# Altium PCB revisi sistem.PcbDoc
Units mil, origin at the board's own origin, x right, y up, seen from the top; angles counter-clockwise.
Board outline 6000 x 4000 mil, 2 copper layers (Top Layer, Bottom Layer); 60 components, 60 nets, 246 pads, 49 vias.
Unrouted connection lines stored in the file: 3.
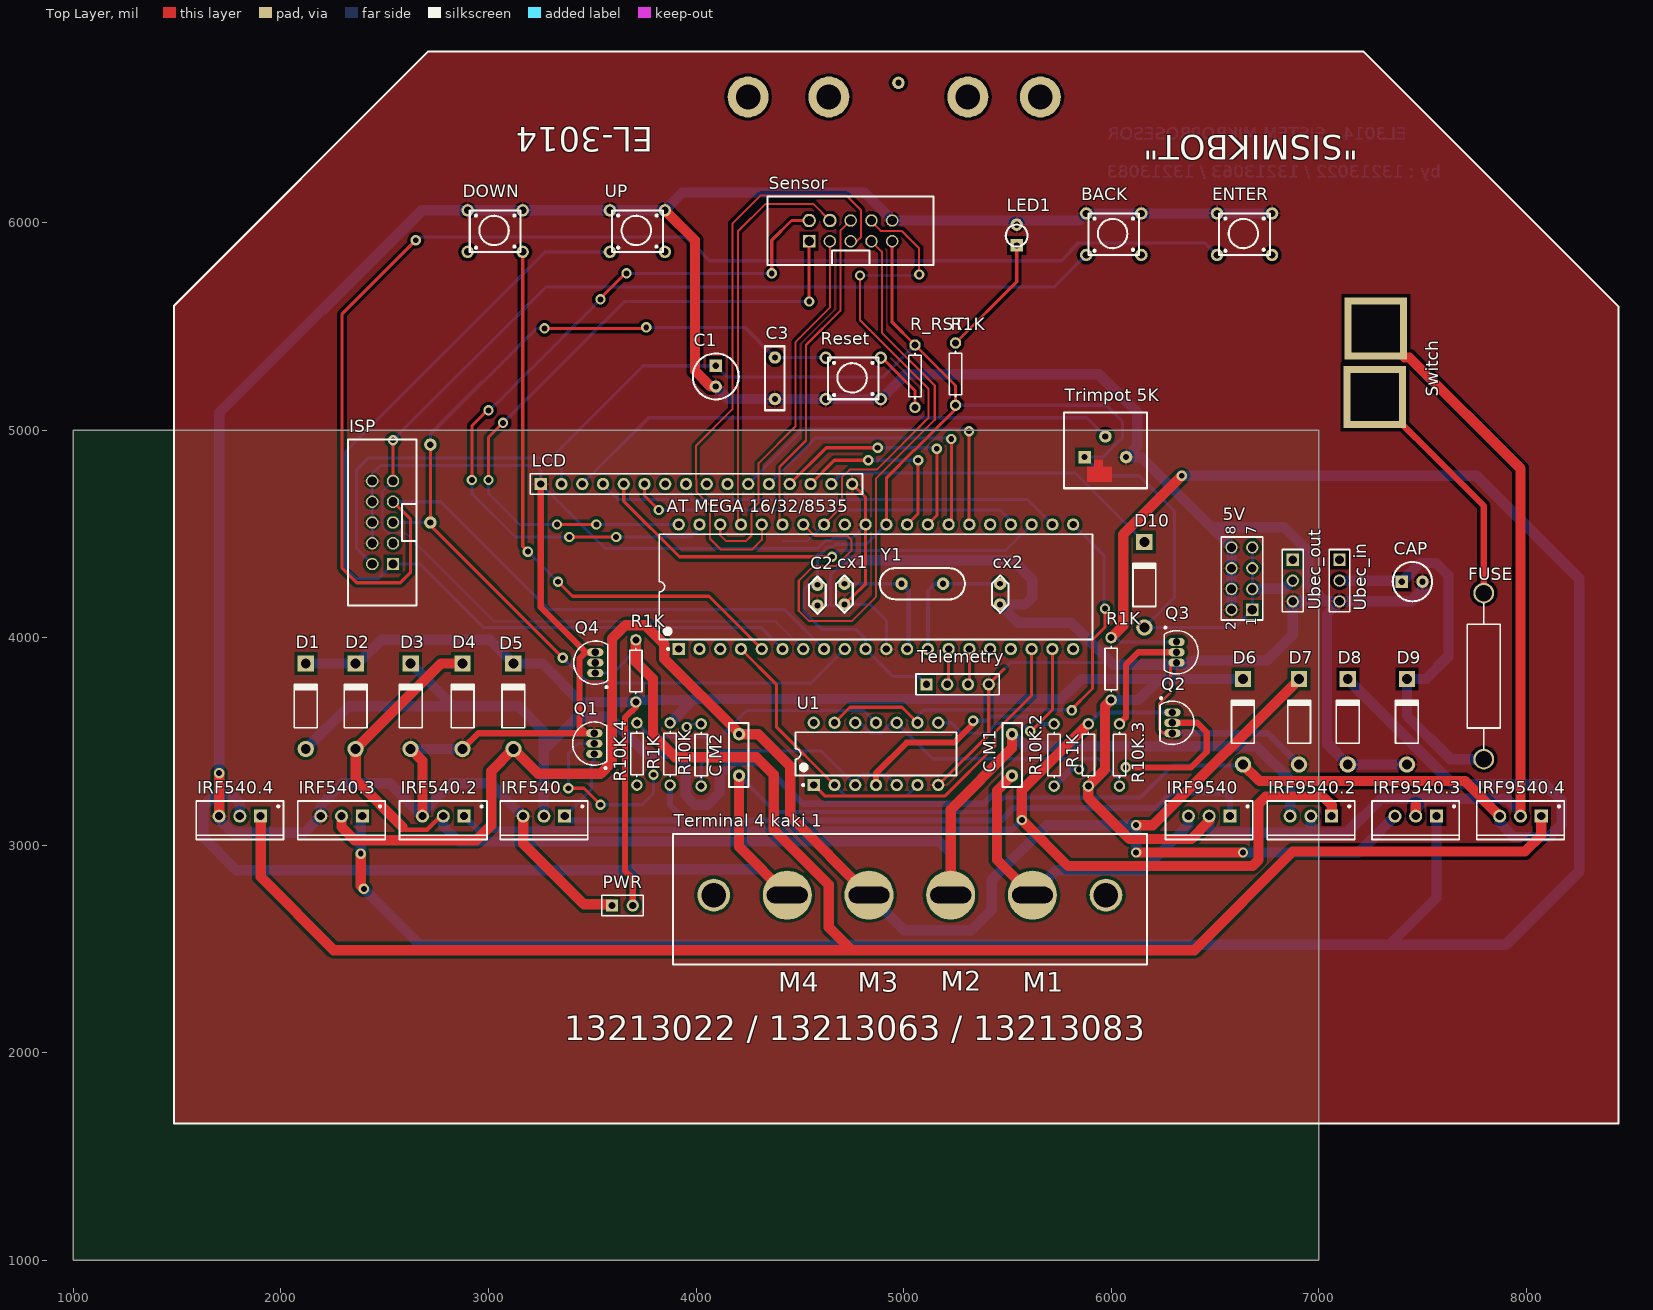
[diagram p0: Top Layer view]
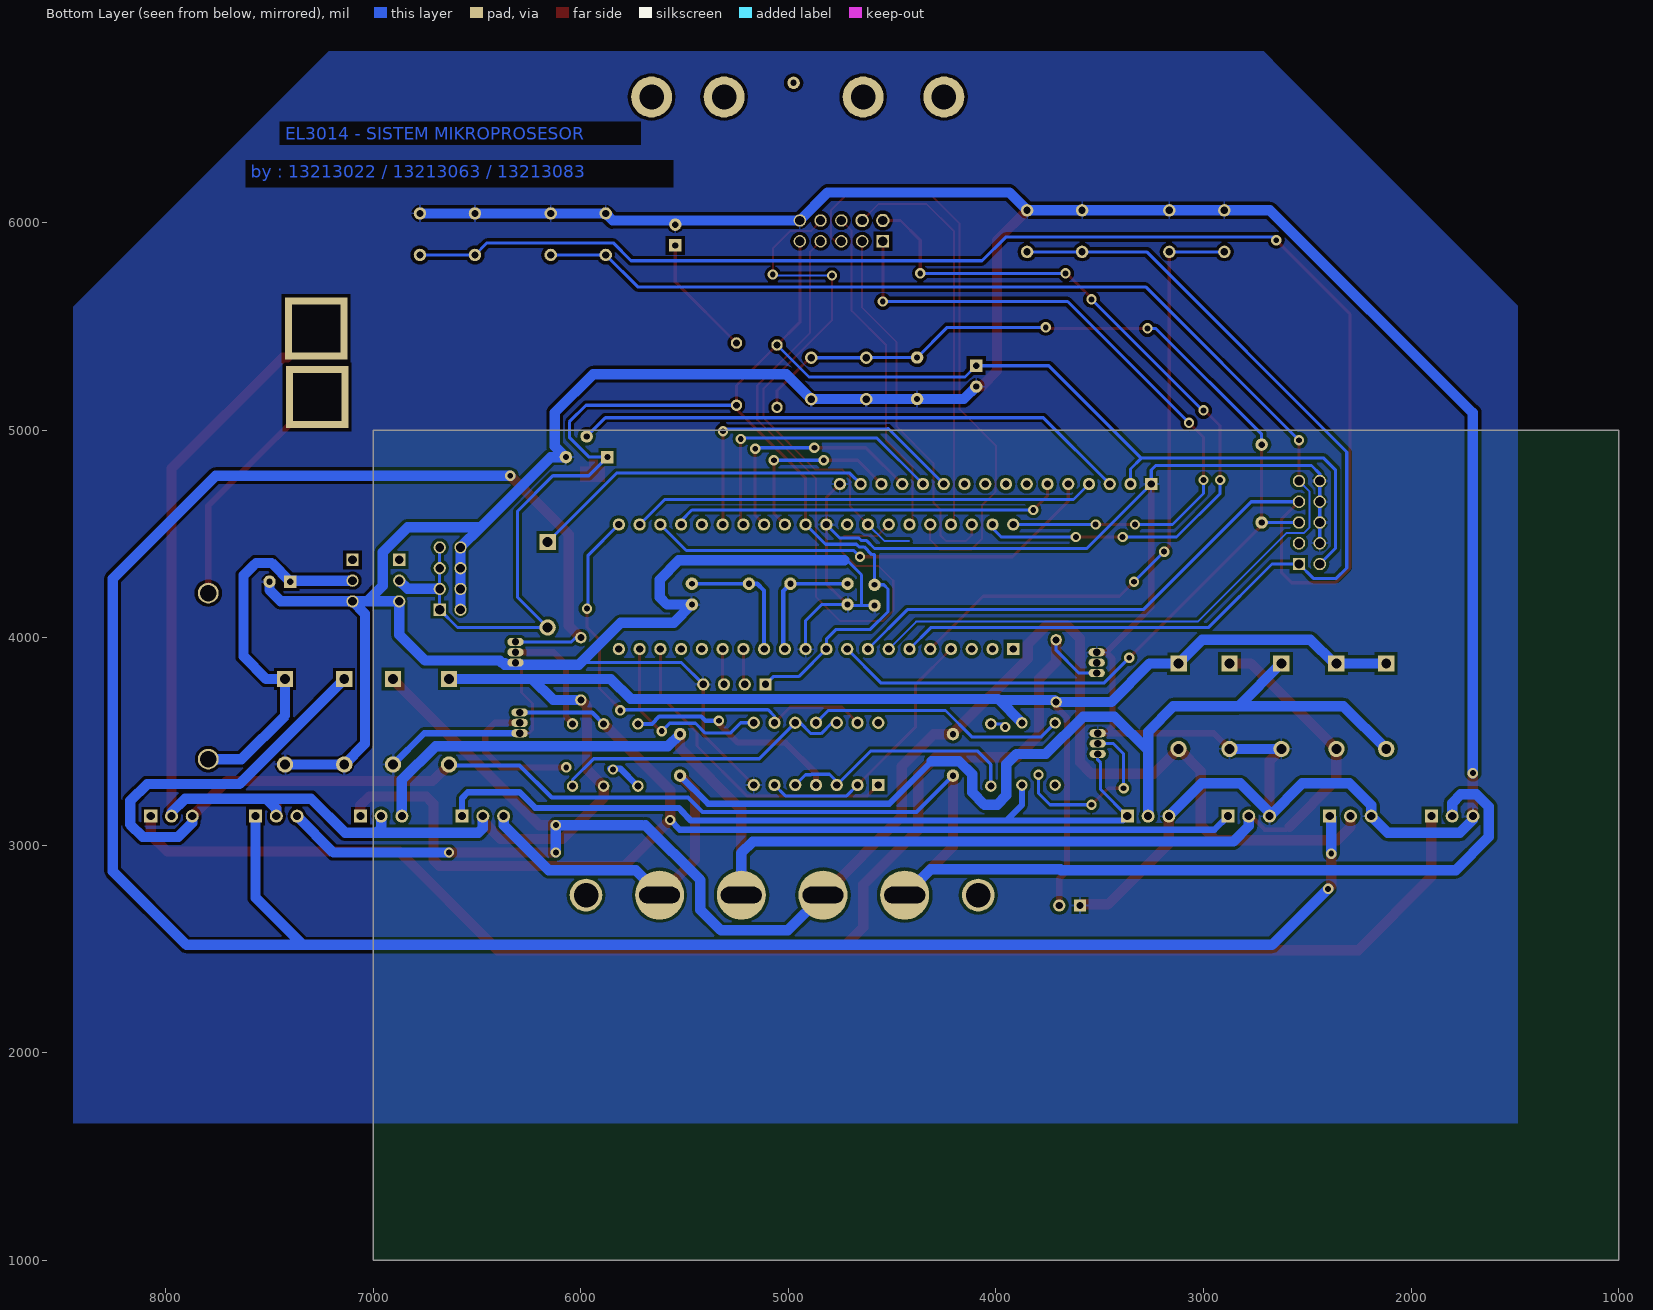
[diagram p1: Bottom Layer view, seen from below]

## Layer stack, top to bottom
Top Solder: solder mask 0.4, Solder Resist, Dk 3.5
Top Layer: signal copper 1.4
Dielectric 1: dielectric 12.6, FR-4, Dk 4.8
Bottom Layer: signal copper 1.4
Bottom Solder: solder mask 0.4, Solder Resist, Dk 3.5

## Board outline
1000,1000 7000,1000 7000,5000 1000,5000

## Design rules (kind name [scope] priority, off if disabled: settings)
Clearance [All] p1: gap=15
PolygonConnect [All] p1: connectstyle=Relief reliefconductorwidth=10 reliefentries=4 polygonreliefangle="90 Angle" airgapwidth=10
RoomDefinition "revisi sistem" [InComponentClass('revisi sistem')] p1: confinementstyle=ConfineIn formatcopy=TRUE lockcomponents=FALSE outline 1450,1570 8535,1570 8535,7260 1450,7260
RoutingVias [All] p1: holewidth=28 width=50 viastyle="Through Hole" minholewidth=28 minwidth=50 maxholewidth=28 maxwidth=50
SolderMaskExpansion [All] p1: expansion=4
Width [All] p1: maxlimit=70 minlimit=10 preferedwidth=15
30 further rules are at their usual default settings.

## Classes and differential pairs
component class "revisi sistem": 5V "AT MEGA 16/32/8535" BACK C1 C2 C3 C.M1 C.M2 CAP cx1 cx2 D1 D2 D3 D4 D5 D6 D7 D8 D9 D10 DOWN ENTER FUSE IRF540 IRF540.2 IRF540.3 IRF540.4 IRF9540 IRF9540.2 IRF9540.3 IRF9540.4 ISP LCD LED1 PWR Q1 Q2 Q3 Q4 R1K R10K R10K.2 R10K.3 R10K.4 R_RST Reset Sensor Telemetry "Terminal 4 kaki 1" "Trimpot 5K" U1 Ubec_in Ubec_out UP Y1

## Components (designator, comment, footprint, x,y, rotation, side; value= is the part's Value field where it differs from the comment)
5V "Header 4X2" HDR2X4 6680,4135 r90 top
"AT MEGA 16/32/8535" "ATmega32-16PI" 40P6 4866.85,4245.28 r90 top (schematic designator U?)
BACK "pushbutton" pushbutton 6445,5945 r0 top (schematic designator S3)
C1 "cap 220uF/16V" "cap 220uF/16V" 4095,5310 r270 top
C2 "cap 22/33uF" "cap 22/33uF" 4585,3855 r90 top
C3 "cap MKM 100nF" "cap MKM 100nF diri" 4380,5250 r90 top
C.M1 "cap MKM 100nF" "cap MKM 100nF diri" 5522.13,3435.28 r270 top
C.M2 "cap MKM 100nF" "cap MKM 100nF diri" 4207.13,3435.28 r90 top
CAP "cap 10uF/16V" "cap 10uF/16V" 7500,4270 r0 top
cx1 "cap 22/33uF" "cap 22/33uF" 4715,3860 r90 top
cx2 "cap 22/33uF" "cap 22/33uF" 5465,3860 r90 top
D1 "Diode 1N4001" DIO10.46-5.3x2.8 2120,3670 r90 top
D2 "Diode 1N4001" DIO10.46-5.3x2.8 2360,3670 r90 top
D3 "Diode 1N4001" DIO10.46-5.3x2.8 2625,3670 r90 top
D4 "Diode 1N4001" DIO10.46-5.3x2.8 2875,3670 r90 top
D5 "Diode 1N4001" DIO10.46-5.3x2.8 3120,3670 r90 top (schematic designator 5)
D6 "Diode 1N4001" DIO10.46-5.3x2.8 6635,3595 r90 top
D7 "Diode 1N4001" DIO10.46-5.3x2.8 6905,3595 r90 top
D8 "Diode 1N4001" DIO10.46-5.3x2.8 7140,3595 r90 top
D9 "Diode 1N4002" DIO10.46-5.3x2.8 7425,3595 r90 top
D10 "Diode 1N4002" DIO10.46-5.3x2.8 6160,4255 r90 top
DOWN "pushbutton" pushbutton 3465,5960 r0 top (schematic designator S1)
ENTER "pushbutton" pushbutton 7075,5945 r0 top (schematic designator S4)
FUSE "Inductor Adj" AXIAL-0.8 7795,3815 r270 top
IRF540 "NMOS-2" SFM-T3/A4.7V 3267.13,3140.28 r180 top
IRF540.2 "NMOS-2" SFM-T3/A4.7V 2782.13,3140.28 r180 top
IRF540.3 "NMOS-2" SFM-T3/A4.7V 2292.13,3140.28 r180 top
IRF540.4 "NMOS-2" SFM-T3/A4.7V 1802.13,3140.28 r180 top
IRF9540 "PMOS-2" SFM-T3/A4.7V 6472.13,3140.28 r180 top
IRF9540.2 "PMOS-2" SFM-T3/A4.7V 6962.13,3140.28 r180 top
IRF9540.3 "PMOS-2" SFM-T3/A4.7V 7467.13,3140.28 r180 top
IRF9540.4 "PMOS-2" SFM-T3/A4.7V 7972.13,3140.28 r180 top
ISP "Header Soket male 10 pin" "Header Soket male 10 pin"#1 2640,4455 r90 top
LCD "Header 16" HDR1X16 3251.85,4740.28 r0 top
LED1 "LED kecil" "LED kecil" 5445,5990 r90 top
PWR "Header 2" HDR1X2 3595,2710 r0 top
Q1 "NPN" BCY-W3 3510,3490 r0 top
Q2 "NPN" BCY-W3 6295,3590 r180 top
Q3 "NPN" BCY-W3 6315,3930 r180 top
Q4 "NPN" BCY-W3 3515,3880 r0 top
R1K "Res1" AXIAL-0.3 5250,5270 r270 top
R1K "Res1" AXIAL-0.3 3875,3440 r90 top
R1K "Res1" AXIAL-0.3 6000,3850 r270 top
R1K "Res1" AXIAL-0.3 5890,3435 r90 top
R1K "Res1" AXIAL-0.3 3710,3840 r90 top
R10K "Res1" AXIAL-0.3 4025,3435 r90 top
R10K.2 "Res1" AXIAL-0.3 5725,3435 r90 top
R10K.3 "Res1" AXIAL-0.3 6040,3435 r90 top
R10K.4 "Res1" AXIAL-0.3 3715,3440 r90 top
R_RST "Res1" AXIAL-0.3 5055,5260 r90 top
Reset "pushbutton" pushbutton 5190,5250 r0 top
Sensor "Header Soket male 10 pin" "Header Soket male 10 pin"#2 4645,5810 r0 top
Telemetry "Header 4" HDR1X4 5110,3775 r0 top
"Terminal 4 kaki 1" "Terminal Blok 4 kaki Besar" "TERMINAL 4 KAKI" 6171.85,3055.28 r180 top
"Trimpot 5K" "Trimpot" "Trimpot Duduk" 6065,4970 r90 top
U1 "CD4011BCN" N14A 4867.13,3440.28 r90 top
Ubec_in "Header 3" HDR1X3#1 7100,4375 r270 top
Ubec_out "Header 3" HDR1X3#2 6875,4375 r270 top
UP "pushbutton" pushbutton 4150,5960 r0 top (schematic designator S2)
Y1 "XTAL" XTAL 5090,4160 r0 top

## Footprints (in the part's own frame and the unit in brackets; to place one, negate y for a bottom-side part, rotate by r counter-clockwise, add the part's x,y. Pads: shape width x height; smd on the part's side, far side on the other; paste and mask are expansions set on the pad)
40P6 [mm] "DIP, 40-Leads, Row Spacing 15.24mm, Pitch 2.54mm, Body 52.2x13.95mm"
  rect 1.5x1.5 hole 0.9: 1(-7.62,24.13)
  round 1.5 hole 0.9: 2(-7.62,21.59) 3(-7.62,19.05) 4(-7.62,16.51) 5(-7.62,13.97) 6(-7.62,11.43) 7(-7.62,8.89) 8(-7.62,6.35) 9(-7.62,3.81) 10(-7.62,1.27) 11(-7.62,-1.27) 12(-7.62,-3.81) 13(-7.62,-6.35) 14(-7.62,-8.89) 15(-7.62,-11.43) 16(-7.62,-13.97) 17(-7.62,-16.51) 18(-7.62,-19.05) 19(-7.62,-21.59) 20(-7.62,-24.13) 21(7.62,-24.13) 22(7.62,-21.59) 23(7.62,-19.05) 24(7.62,-16.51) 25(7.62,-13.97) 26(7.62,-11.43) 27(7.62,-8.89) 28(7.62,-6.35) 29(7.62,-3.81) 30(7.62,-1.27) 31(7.62,1.27) 32(7.62,3.81) 33(7.62,6.35) 34(7.62,8.89) 35(7.62,11.43) 36(7.62,13.97) 37(7.62,16.51) 38(7.62,19.05) 39(7.62,21.59) 40(7.62,24.13)
  silkscreen extent -7.74,-26.5 6.45,26.5, body extent -7.05,-26.47 7.05,26.47, height 4.83
AXIAL-0.3 [mm] "Axial Device, Thru-Hole; 2 Leads; 0.3 in Pin Spacing"
  round 1.4 hole 0.85: 1(-3.81,0) 2(3.81,0)
  silkscreen extent -2.77,-0.76 2.77,0.76
AXIAL-0.8 [mil] "Axial Device, Thru-Hole; 2 Leads; 0.8 in Pin Spacing"
  round 100 hole 80: 1(-400,0) 2(400,0)
  silkscreen extent -350,-80 350,80
BCY-W3 [mm] "TO, Flat Index; 3 In-Line, Axial Leads; Body Dia. 4.8mm; Leads 0.55 x 0.51 mm (max)"
  oval 2x1 hole 0.9: 1(0,-1.27) 2(0,0) 3(0,1.27)
  silkscreen extent -2.65,-3.13 1.52,2.65, body extent -2.66,-2.66 1.52,2.66, height 5.33
"cap 10uF/16V" [mil]
  rect 60x60 hole 30: 1(-100,0)
  round 60 hole 30: 2(0,0)
  silkscreen extent -144,-95 46,95
"cap 22/33uF" [mil]
  round 60 hole 28: 1(300,0) 2(400,0)
  silkscreen extent 260,-40 440,40
"cap 220uF/16V" [mil]
  rect 60x60 hole 30: 1(0,0)
  round 60 hole 30: 2(100,0)
  silkscreen extent -59,-111 162,111
"cap MKM 100nF diri" [mil]
  round 60 hole 30: 1(-100,0) 2(100,0)
  silkscreen extent -154,-46 154,48
DIO10.46-5.3x2.8 [mm] "Diode, Axial; Body 5.2 x 2.7 mm (LxDia. max), Lead Dia. 0.86 mm (max)"
  round 2 hole 1.2: 1(-5.23,0)
  rect 2x2 hole 1.2: 2(5.23,0)
  silkscreen extent -2.65,-1.4 2.75,1.4
HDR1X2 [mm] "Connector; Header; 2 Position"
  rect 1.5x1.5 hole 0.9: 1(0,0)
  round 1.5 hole 0.9: 2(2.54,0)
  silkscreen extent -1.27,-1.27 3.81,1.27
HDR1X3#1 [mm] "Connector; Header; 3 Position"
  rect 1.5x1.5 hole 1.067: 1(0,0)
  round 1.5 hole 1.067: 2(2.54,0) 3(5.08,0)
  silkscreen extent -1.27,-1.27 6.35,1.27
HDR1X3#2 [mm] "Connector; Header; 3 Position"
  rect 1.524x1.524 hole 1.067: 1(0,0)
  round 1.5 hole 1.067: 2(2.54,0) 3(5.08,0)
  silkscreen extent -1.27,-1.27 6.35,1.27
HDR1X4 [mm] "Connector; Header; 4 Position"
  rect 1.5x1.5 hole 0.9: 1(0,0)
  round 1.5 hole 0.9: 2(2.54,0) 3(5.08,0) 4(7.62,0)
  silkscreen extent -1.27,-1.27 8.89,1.27
HDR1X16 [mm] "Connector; Header; 16 Position"
  rect 1.5x1.5 hole 0.9: 1(0,0)
  round 1.5 hole 0.9: 2(2.54,0) 3(5.08,0) 4(7.62,0) 5(10.16,0) 6(12.7,0) 7(15.24,0) 8(17.78,0) 9(20.32,0) 10(22.86,0) 11(25.4,0) 12(27.94,0) 13(30.48,0) 14(33.02,0) 15(35.56,0) 16(38.1,0)
  silkscreen extent -1.27,-1.27 39.37,1.27
HDR2X4 [mm] "Connector; Header; 4x2 Position"
  rect 1.5x1.5 hole 1.143: 1(0,0)
  round 1.5 hole 1.067: 2(0,2.54) 3(2.54,0) 4(2.54,2.54) 5(5.08,0) 6(5.08,2.54) 7(7.62,0) 8(7.62,2.54)
  silkscreen extent -1.27,-1.27 8.89,3.81
"Header Soket male 10 pin"#1 [mil]
  rect 60x60 hole 45: 1(-100,100)
  round 60 hole 45: 2(-100,200) 3(0,100) 4(0,200) 5(100,100) 6(100,200) 7(200,100) 8(200,200) 9(300,100) 10(300,200)
  silkscreen extent -300,-14 500,316
"Header Soket male 10 pin"#2 [mil]
  rect 60x60 hole 45: 1(-100,100)
  round 65 hole 45: 2(-100,200) 4(0,200)
  round 60 hole 45: 3(0,100) 5(100,100) 6(100,200) 7(200,100) 8(200,200) 9(300,100) 10(300,200)
  silkscreen extent -300,-14 500,316
"LED kecil" [mil]
  rect 60x60 hole 30: 1(-100,-100)
  round 60 hole 30: 2(0,-100)
  silkscreen extent -106,-153 0,-47
N14A [mm] "DIP, 14-Leads, Row Spacing 7.62mm, Pitch 2.54mm, Body 19.18x6.35mm"
  rect 1.5x1.5 hole 0.9: 1(-3.81,7.62)
  round 1.5 hole 0.9: 2(-3.81,5.08) 3(-3.81,2.54) 4(-3.81,0) 5(-3.81,-2.54) 6(-3.81,-5.08) 7(-3.81,-7.62) 8(3.81,-7.62) 9(3.81,-5.08) 10(3.81,-2.54) 11(3.81,0) 12(3.81,2.54) 13(3.81,5.08) 14(3.81,7.62)
  silkscreen extent -3.93,-9.85 2.65,9.85, body extent -3.55,-9.85 3.55,9.85, height 5.08
pushbutton [mil]
  round 60 hole 35: 1(-565,-101) 1(-300,-101) 2(-565,99) 2(-300,99)
  silkscreen extent -555,-101 -310,99
SFM-T3/A4.7V [mm] "TO, Thru-Hole, Vertical, Heatsink Mounted; 3 In-Line Leads; Pitch 2.54 mm"
  rect 1.6x1.6 hole 1: 1(-2.54,0)
  round 1.6 hole 1: 2(0,0) 3(2.54,0)
  silkscreen extent -5.35,-1.85 5.35,2.85, body extent -5.4,-1.9 5.4,2.9, height 19.3
"TERMINAL 4 KAKI" [mm] "TERMINAL HITAM 4 KAKI"
  round 6 hole 2 slot 5 at 0 deg: 1(14,7.5) 2(24,7.5) 3(34,7.5) 4(44,7.5)
  round 4 hole 3: " "(5,7.5) " "(53,7.5)
  silkscreen extent 0,0 58,16
"Trimpot Duduk" [mil]
  rect 60x60 hole 30: 1(-100,193)
  round 60 hole 30: 2(0,93) 3(-100,-7)
  silkscreen extent -250,-107 115,293
XTAL [mil]
  round 60 hole 30: 1(-100,100) 2(100,100)
  silkscreen extent -205,25 205,175

## Part data
5V: "Header, 4-Pin, Dual row"
"AT MEGA 16/32/8535": "8-Bit AVR Microcontroller with 32K Bytes of In-System Programmable Flash Memory"
D1 D2 D3 D4 D5 D6 D7 D8 D9 D10: "1 Amp General Purpose Rectifier"
FUSE: "Adjustable Inductor"
IRF540 IRF540.2 IRF540.3 IRF540.4: "N-Channel Power MOSFET"
IRF9540 IRF9540.2 IRF9540.3 IRF9540.4: "P-Channel Power MOSFET"
LCD: "Header, 16-Pin"
PWR: "Header, 2-Pin"
Q1 Q2 Q3 Q4: "NPN Bipolar Transistor"
R1K R1K R1K R1K R1K R10K R10K.2 R10K.3 R10K.4 R_RST: "Resistor"
Telemetry: "Header, 4-Pin"
"Terminal 4 kaki 1": library part "Terminal Blok 4 kaki"
"Trimpot 5K": library part "Trimpot Duduk"
U1: "Quad 2-Input NAND Buffered B series Gate, 14-Pin PDIP"
Ubec_in Ubec_out: "Header, 3-Pin"

## Free pads (board coordinates)
  round 196.85 hole 118.11: 0(4250.75,6605) 0(5659.25,6605) 2(5310,6605) 3(4640,6605)
  round 60 hole 30: 1(4975,6673.43) 2(2720,4555) 3(2720,4930)
  rect 300x300 hole 230 square: 4(7270,5160) 4(7275,5490)

## Via types
v1: diameter 50, hole 28, Top Layer to Bottom Layer, 49 vias

## Nets (pads, with @x,y where several pads share a name; then routed paths per layer and width w, separated by ;. In a path a pad name is that pad's centre, name@x,y a point inside that pad or via, vN(x,y) a via of type N, cw(c..) or ccw(c..) an arc to the next point about the centre after c; other vN are vias at no path point)
12-V: FUSE.1 pad.4@7270,5160 | length 1335.7
  Top Layer w30: pad.4@7147.5,5282.5 7795,4635 FUSE.1
12V: D1.2 D2.2 D5.2 D6.2 IRF9540.2 IRF9540.2.2 IRF9540.3.2 IRF9540.4.2 pad.4@7275,5490 PWR.2 R1K.1@3710,3690 R1K.1@5890,3285 R1K.2@3875,3590 R1K.2@6000,3700 | length 12167
  Top Layer w30: PWR.2 3695,2840 3657.44,2877.56 3657.44,3613.84 3691.16,3647.56 3692.56,3647.56 3710,3665 R1K.1@3710,3690
  Top Layer w50: R1K.2@6000,3700 5970,3670 5970,3365 5890,3285 5890,3230 6090,3030 6385,3030 6472.13,3117.13 IRF9540.2 ; pad.4@7157.5,5607.5 7415,5350 7436.57,5350 7972.13,4814.44 IRF9540.4.2 ; IRF9540.3.2 7467.13,3192.87
  Bottom Layer w15: D2.2 D2.2@2370.91,3875.91
  Bottom Layer w50: D1.2 D2.2 ; D2.2@2370.91,3875.91 2485,3990 3005.91,3990 D5.2 3259.09,3875.91 3445,3690 3710,3690 3720,3700 3985,3700 ; R1K.2@3875,3590 3990,3705 5760,3705 5855.91,3800.91 6234.41,3800.91 ; R1K.2@6000,3700 6133.5,3700 6234.41,3800.91 ; IRF9540.2 6472.13,3082.87 6495,3060 6985,3060 ; D6.2 6234.41,3800.91 ; IRF9540.2.2 6962.13,3082.87 6985,3060 ; IRF9540.3.2 7467.13,3177.13 7515,3225 ; IRF9540.4.2 7972.13,3157.87 7905,3225 7515,3225 ; 6985,3060 7135,3060 7300,3225 7515,3225
B1: "AT MEGA 16/32/8535.5" DOWN.1 | length 3069.1
  Top Layer w15: DOWN.1@3165,5859 3165,4440 v1(3190,4415) ; v1@3325,4280 v1(3335,4270) 3405,4200 4062.13,4200 4316.85,3945.28
  Bottom Layer w15: DOWN.1@2900,5859 DOWN.1@3165,5859 ; v1@3180,4425 v1(3190,4415) v1(3335,4270)
B2: "AT MEGA 16/32/8535.6" ISP.1 UP.1 | length 4824.2
  Bottom Layer w15: UP.1@3850,5859 3585,5859 3274,5859 2310,4895 2310,4336 2360,4286 2471,4286 ISP.1 2670,4355 2975,4050 4312.13,4050 4416.85,3945.28
B3: "AT MEGA 16/32/8535.7" BACK.1 ISP.9 | length 6685.7
  Top Layer w15: ISP.9 v1(2540,4951)
  Bottom Layer w10: ISP.9 2490,4705 2490,4530 2515,4505 2600,4505 3027.5,4077.5 4384.63,4077.5 4516.85,3945.28
  Bottom Layer w15: v1(2540,4951) 3279,5690 5726,5690 5880,5844 BACK.1@6145,5844
B4: "AT MEGA 16/32/8535.8" ENTER.1 ISP.7 | length 9090.9
  Top Layer w15: ISP.7 2625,4570 2625,4315 2575,4265 2365,4265 2295,4335 2295,5560 v1(2650,5915)
  Bottom Layer w15: ISP.7 2770,4655 3290,4135 4427.13,4135 4616.85,3945.28 ; v1(2650,5915) 2665,5930 3953,5930 4067,5816 5758,5816 5844,5902 6452,5902 6510,5844 ENTER.1@6775,5844
DIR1: "AT MEGA 16/32/8535.18" U1.1 | length 1534.5
  Top Layer w15: U1.1 4619.4,3238 5200,3238 5440,3478 5440,3545 5616.85,3721.85 5616.85,3945.28
DIR2: "AT MEGA 16/32/8535.19" U1.8 | length 951.1
  Top Layer w15: v1@5605,3540 5716.85,3651.85 5716.85,3945.28
  Bottom Layer w15: U1.8@5167.4,3590 U1.8 5229.72,3590.28 5280,3540 5400,3540 5447.78,3587.78 5572.22,3587.78 v1(5610,3550)
EN1: "AT MEGA 16/32/8535.1"
EN2: "AT MEGA 16/32/8535.2"
GND: 5V.2 5V.4 5V.6 5V.8 "AT MEGA 16/32/8535.11" "AT MEGA 16/32/8535.31" "Trimpot 5K.3" BACK.2 C1.2 C2.1 C3.1 CAP.2 cx1.1 cx2.1 D3.1 D4.1 D7.1 D8.1 D9.1 DOWN.2 ENTER.2 IRF540.2.3 IRF540.3 IRF540.3.3 IRF540.4.3 ISP.4 ISP.6 ISP.8 ISP.10 LCD.1 LCD.16 LED1.2 PWR.1 Q1.3 Q2.3 Q3.3 Q4.3 Reset.1 Sensor.10 Telemetry.4 U1.7 Ubec_in.3 Ubec_out.3 UP.2 | length 29396
  Top Layer w15: 3461.5,3540 3470,3540 ; C1.2@4070,5210 C1.2 ; cx1.1 4746,4191 4747.85,4191 4816.85,4260 4816.85,4545.28 4816.85,4675.28 LCD.16 ; U1.7 5410,3533.15 Telemetry.4 5483,3848 ; Q2.3 6250,3540 6233,3557 6233,3683 6286,3736 6286,3880 Q3.3
  Top Layer w30: D4.1 2950.91,3540 3461.5,3540 ; LCD.1 3251.85,4147.15 3469,3930 ; 3470,3540 3439,3571 3439,3900 3469,3930 ; Q4.3 3469,3930
  Top Layer w50: IRF540.4.3 v1(1702.13,3347.87) ; D3.1 2682.13,3406.97 IRF540.2.3 ; IRF540.3 3167.13,3007.87 3460,2715 3590,2715 PWR.1 ; UP.2@3850,6059 3995,5914 3995,5285 C1.2@4070,5210
  Bottom Layer w15: 1702.13,5085 1706,5085 ; ISP.4 ISP.6 ISP.8 ISP.10 2440,4790 2480,4830 3230,4830 3251.85,4808.15 LCD.1 3562.13,4430 4585.4,4430 4622.9,4467.5 4647.65,4467.5 4660.15,4480 4751.57,4480 4816.85,4545.28 ; C2.1 4647.5,4155 ; 4730,4375 4720,4375 4647.5,4302.5 4647.5,4155 ; 4916.85,3945.28 4916.85,4083.15 4840,4160 cx1.1 4710,4155 4647.5,4155 ; Telemetry.4 5515,3880 6000,3880
  Bottom Layer w30: Q2.3 6754.09,3540 D7.1
  Bottom Layer w50: IRF540.4.3 1702.13,3122.87 1764.85,3060.15 2112,3060.15 IRF540.3.3 2192.13,3192.13 2298,3298 2524.4,3298 IRF540.2.3 2682.13,3157.13 2823,3298 3009.4,3298 IRF540.3 ; v1(1702.13,3347.87) 1702.13,5085 ; 1706,5085 2680,6059 2900,6059 3165,6059 3585,6059 3850,6059 3936,6145 4810,6145 Sensor.10 5846,6010 5880,6044 6145,6044 6510,6044 ENTER.2@6775,6044 ; D3.1 D4.1 ; C1.2 4155,5150 C3.1 4889,5150 4890,5149 5010,5269 5941,5269 6125,5085 6125,4923 6072,4870 6145,4870 6482.5,4532.5 ; 4730,4372.5 5527.5,4372.5 5620,4280 5620,4195 5585,4160 cx2.1 5553,4072 5808,4072 6000,3880 6009.69,3870.32 6367.05,3870.32 6367.05,3877.95 6377.95,3877.95 6390,3890 6750,3890 6875,4015 Ubec_out.3 7030,4175 ; 5V.2 5V.4 5V.6 5V.8 6482.5,4532.5 ; D9.1 D8.1 7040,3489.09 7040,4115 Ubec_in.3 ; CAP.2 7500,4230 7445,4175 Ubec_in.3 ; 6482.5,4532.5 6834.07,4532.5 6955,4411.57 6955,4250 7030,4175 ; 7030,4175 Ubec_in.3
M1: "Terminal 4 kaki 1.1" C.M1.2 D1.1 D3.2 IRF540.2 IRF9540.3 | length 6460.4
  Top Layer w50: C.M1.2 5450,3263.15 5450,2930.67 5620.67,2760
  Bottom Layer w30: 4308.72,3405.28 4514,3200 5386.85,3200 C.M1.2
  Bottom Layer w50: D1.1 2325.91,3670 2830.91,3670 ; D3.2 2830.91,3670 ; IRF540.2 3267.13,3457.13 ; 4308.72,3405.28 4178.13,3405.28 4115,3342.14 4115,3255 4055.5,3195.5 3994.5,3195.5 3950,3240 3950,3390 3900,3440 3760,3440 3580,3620 3430,3620 3267.13,3457.13 ; 5620.67,2760 5620.67,2765.67 5735,2880 6155,2880 6372.13,3097.13 IRF9540.3 ; 2830.91,3670 3145,3670 3267.13,3547.87 3267.13,3457.13
M2: "Terminal 4 kaki 1.2" C.M1.1 D2.1 D4.2 IRF540.2.2 IRF9540.2.3 | length 6635.7
  Top Layer w20: 2585,3090 2600,3075 2705,3075 2770.28,3140.28 IRF540.2.2
  Top Layer w50: 2585,3090 2360,3315 D2.1 2771.81,3875.91 D4.2 ; 5226.97,2760 5226.97,3171.97 5522.13,3467.13 C.M1.1
  Bottom Layer w50: IRF540.2.2 2782.13,3092.87 2857,3018 5172,3018 5226.97,2963.03 5226.97,2760 ; C.M1.1 5580.4,3477 6700,3477 6862.13,3314.87 IRF9540.2.3
M3: "Terminal 4 kaki 1.3" C.M2.2 D5.1 D7.2 IRF540.3.2 IRF9540.3.3 | length 8602.7
  Top Layer w15: v1(6635,2965) v1@6645,2965
  Top Layer w50: IRF540.3.2 2292.13,3087.87 2355,3025 2942,3025 3013,3096 3013,3357.09 D5.1 3239.09,3345 3540,3345 3595,3400 3595,3995 3660,4060 3755,4060 3847.32,3967.68 3847.32,3899.18 4207.13,3539.38 C.M2.2 4299.72,3535.28 4454.13,3380.87 4454.13,3139.13 4833.27,2760 ; v1(6120,2965) v1(6635,2965) ; v1(6120,3097) 6201.09,3097 D7.2
  Bottom Layer w15: 5689,3097 5699,3107 5709,3097 ; v1(6120,2965) 6120,2985 6130,2995
  Bottom Layer w50: 4833.27,2760 5003.27,2590 5325,2590 5425,2690 5425,2833 5689,3097 ; 5709,3097 v1(6120,3097) v1(6120,2965) ; v1(6635,2965) 7191.85,2965 IRF9540.3.3
M4: "Terminal 4 kaki 1.4" C.M2.1 D6.1 D8.2 IRF540.4.2 IRF9540.4.3 | length 9739.5
  Top Layer w15: IRF9540.4.3@7872,3140.28 IRF9540.4.3
  Top Layer w50: C.M2.1 4207.13,2992.44 4439.57,2760 ; D6.1 6714.37,3309.72 7702.68,3309.72 IRF9540.4.3
  Bottom Layer w15: D6.1@6630.91,3385 D6.1
  Bottom Layer w20: C.M2.1 4382.4,3160 5414.13,3160 5484.13,3230 6140,3230 6295,3385 D6.1@6630.91,3385
  Bottom Layer w50: IRF540.4.2 1802.13,3202.87 1760,3245 1685,3245 1625,3185 1625,3040 1785,2880 3686.67,2880 3691.2,2884.53 4315.04,2884.53 4439.57,2760 ; D8.2 7645.91,3295 8090,3295 8170,3215 8170,3100 8110,3040 7940,3040 7872.13,3107.87 IRF9540.4.3
Netcx1_2: "AT MEGA 16/32/8535.12" cx1.2 Y1.1 | length 607.6
  Bottom Layer w15: cx1.2 Y1.1 ; 5016.85,3945.28 5025,3953.43
  Bottom Layer w20: Y1.1 5025,4225 5025,3953.43
Netcx2_2: "AT MEGA 16/32/8535.13" cx2.2 Y1.2 | length 643.5
  Bottom Layer w15: Y1.2 cx2.2
  Bottom Layer w20: 5116.85,3945.28 5116.85,4226.85 5150,4260 Y1.2
NetD10_2: D10.2 LCD.15 | length 1667.5
  Bottom Layer w15: LCD.15 4704.57,4793 5827.91,4793 D10.2
NetIRF540.2_1: IRF540.2.1 IRF9540.2.1 Q2.1 R1K.2@5890,3585 | length 5709.6
  Top Layer w15: IRF9540.2.1 IRF9540.2.1@7063,3140.28
  Top Layer w50: R1K.2@5890,3585 5570,3265 v1(5570,3122) 5792,2900 6680,2900 6710,2930 6710,3200 6745,3235 7020,3235 7062.13,3192.87 IRF9540.2.1
  Bottom Layer w20: R1K.2@5890,3585 5945,3640 Q2.1
  Bottom Layer w30: IRF540.2.1 2947.4,3075 5523,3075 v1(5570,3122)
NetIRF540.3_1: IRF540.3.1 IRF9540.3.1 Q3.1 R1K.1@6000,4000 | length 11995.4
  Top Layer w15: v1@2392.13,2797.87 v1(2400,2790) ; v1(6340,4780) v1@6350,4790
  Top Layer w50: v1(2385,2960) 2385,2805 v1@2392.13,2797.87 ; R1K.1@6000,4000 6057.5,4057.5 6057.5,4497.5 v1(6340,4780)
  Bottom Layer w15: v1(2385,2960) 2389.25,2960 2392.13,2962.87 v1@2395,2960 ; v1@2395,2795 v1(2400,2790) ; R1K.1@6000,4000 6025,4000 6045,3980 Q3.1
  Bottom Layer w50: v1(2385,2960) 2385,3133.15 2390,3138.15 IRF540.3.1 ; v1(2400,2790) 2670,2520 7340,2520 ; v1(6340,4780) 7760,4780 8255,4285 8255,2875 7900,2520 7340,2520 ; IRF9540.3.1 7567.13,2747.13 7340,2520
NetIRF540.4_1: IRF540.4.1 IRF9540.4.1 Q4.1 R1K.2@3710,3990 | length 9375.2
  Top Layer w50: IRF540.4.1 1902.13,2847.87 2255,2495 4750,2495 ; R1K.2@3710,3990 3710,3885 3792.5,3802.5 3792.5,3531.5 3900,3424 4291,3424 4375,3340 4375,3075 4640,2810 4640,2605 4750,2495 ; IRF9540.4.1 8072.13,3049.13 7993,2970 6875,2970 6400,2495 4750,2495
  Bottom Layer w15: Q4.1 3601,3830 3710,3939 R1K.2@3710,3990
NetIRF540_1: IRF540.1 IRF9540.1 Q1.1 R1K.1@3875,3290 | length 3928.6
  Bottom Layer w15: IRF540.1 3495.64,3268.79 3495.64,3396.91 3510,3411.27 Q1.1
  Bottom Layer w30: IRF540.1 3387.4,3120 3948.5,3120 ; R1K.1@3875,3290 3875,3193.5 3948.5,3120 ; IRF9540.1 6572.13,3227.87 6545,3255 6295,3255 6220,3180 5528.11,3180 5476.57,3125 5471.57,3120 3948.5,3120
NetLCD_3: "Trimpot 5K.2" LCD.3 | length 2689.8
  Bottom Layer w15: LCD.3 3771.51,5059.94 5882.06,5059.94 5972,4970
NetLED1_1: LED1.1 R1K.1@5250,5420 | length 592.2
  Top Layer w15: R1K.1@5250,5420 5545,5715 LED1.1
NetQ1_2: Q1.2 R10K.2 | length 981.1
  Top Layer w15: v1(3385,3275) 3460,3275 v1(3540,3195) v1@3550,3185
  Bottom Layer w15: v1@3385,3265 v1(3385,3275) 3385,3440 3435,3490 Q1.2 ; v1(3540,3195) 3740,3195 3795,3250 v1(3795,3340) ; v1@3945,3560 3970,3585 R10K.2
  other v1: 3955,3570 3955,3570
NetQ2_2: Q2.2 R10K.2.1 | length 902.4
  Top Layer w30: v1@6060,3375 6385,3375 6460,3450 6460,3545 6415,3590 Q2.2 Q2.2@6272.5,3590
  Bottom Layer w30: R10K.2.1 5810,3370 v1@5860,3370
  other v1: 5845,3365 5845,3365 6070,3375
NetQ3_2: Q3.2 R10K.3.2 | length 566.7
  Top Layer w30: R10K.3.2 6071,3616 6071,3870 6131,3930 Q3.2
NetQ4_2: Q4.2 R10K.4.1
NetR10K.2_2: R10K.2.2 U1.4 | length 1051.3
  Top Layer w30: U1.4 4867.13,3347.13 5015,3495 5245,3495 5335,3585 v1(5335,3600)
  Bottom Layer w20: v1(5335,3600) 5400,3600 5420,3620 5420.28,3620.28 5622.22,3620.28 5622.5,3620 5657.5,3585 R10K.2.2
NetR10K.3_1: R10K.3.1 U1.10 U1.12 | length 1460.2
  Bottom Layer w15: U1.12 4790,3590.28 4842.28,3538 4891,3538 4943.28,3590.28 U1.10 5140.4,3417 5938,3417 6040,3315 R10K.3.1
NetR10K.4_2: R10K.4.2 U1.11 | length 1258.1
  Bottom Layer w15: R10K.4.2 3784,3521 4115,3521 4243,3649 4808.4,3649 U1.11
NetR10K_1: R10K.1 U1.3 U1.5 | length 1195.3
  Bottom Layer w15: R10K.1 4025,3390 4090,3455 4602.4,3455 U1.3 4767.13,3307.13 4802.3,3342.3 4888.68,3342.3 4890.98,3340 4917.4,3340 U1.5
P1: "AT MEGA 16/32/8535.3"
P2: "AT MEGA 16/32/8535.20"
P3: "AT MEGA 16/32/8535.17"
P4: "AT MEGA 16/32/8535.16"
PA0: "AT MEGA 16/32/8535.40" Sensor.1 | length 3411.5
  Top Layer w15: v1(3000,4760) 3000,4965 v1(3070,5035) v1@3075,5040 ; v1@3320,4535 v1(3330.28,4545.28) v1(3520,4545.28) ; v1(4545,5620) Sensor.1
  Bottom Layer w15: v1@3000,4775 v1(3000,4760) 3000,4695 3149.72,4545.28 v1(3330.28,4545.28) ; v1(3070,5035) 3655,5620 v1(4545,5620) ; v1@3500.28,4545.28 v1(3520,4545.28) 3916.85,4545.28
PA1: "AT MEGA 16/32/8535.39" Sensor.2 | length 3731.7
  Top Layer w15: v1(2920,4760) 2920,5020 v1@3005,5105 ; v1@3380,4485 v1(3390,4485) v1(3615,4485) ; v1(3540,5630) 3540,5635 v1@3670,5765 ; v1(4365,5755) 4365,5915 4460,6010 Sensor.2
  Bottom Layer w15: v1(2920,4760) 2920,4695 3130,4485 v1(3390,4485) ; v1(3000,5095) 3005,5095 v1(3540,5630) ; v1@3605,4485 v1(3615,4485) 3975,4485 4016.85,4526.85 4016.85,4545.28 ; v1(3665,5755) v1(4365,5755) 4375,5755 v1@4380,5760
PA2: "AT MEGA 16/32/8535.38" Sensor.3 | length 1799.7
  Top Layer w10: 4116.85,4545.28 4116.85,4493.15 4145,4465 4240,4465 4267.32,4492.32 4267.32,4617.32 4301.38,4651.38 4301.38,4841.38 4480,5020 4480,5425 4645,5590 Sensor.3
PA3: "AT MEGA 16/32/8535.37" Sensor.4 | length 1948.8
  Top Layer w10: 4216.85,4545.28 4202.32,4559.8 4202.32,5957.32 4335,6090 4565,6090 Sensor.4
PA4: "AT MEGA 16/32/8535.36" Sensor.5 | length 2875.1
  Top Layer w10: 4316.85,4545.28 4316.85,4471.85 4270,4425 4120,4425 4067.32,4477.68 4067.32,4637.68 4001.38,4703.62 4001.38,4762.17 4000,4763.55 4000,4925 4175,5100 4175,5995 4310,6130 4725,6130 4795,6060 4795,5930 4775,5910 Sensor.5
PA5: "AT MEGA 16/32/8535.35" Sensor.6 | length 1612.7
  Top Layer w10: 4416.85,4545.28 4402.32,4559.8 4402.32,4822.32 4530,4950 4530,5410 4695,5575 4695,5960 Sensor.6
PA6: "AT MEGA 16/32/8535.34" Sensor.7 | length 3171.4
  Top Layer w10: 4516.85,4545.28 4572.13,4490 4730,4490 4750,4470 4750,4421.36 4673.64,4345 4565,4345 4495,4275 4495,4130 4545,4080 4750.09,4080 4867.32,4197.23 4867.32,4767.32 5150,5050 5150,5215 4895,5470 4895,5860 Sensor.7
PA7: "AT MEGA 16/32/8535.33" Sensor.8 | length 2587
  Top Layer w10: 4616.85,4545.28 4616.85,4546.85 4702.32,4632.32 4702.32,4772.32 4740,4810 4870,4810 5120,5060 5120,5200 4790,5530 v1(4790,5745) v1@4790,5760 ; Sensor.8 4845,6005 4890,5960 4990,5960 5075,5875 v1(5075,5750) v1@5075,5730
  Bottom Layer w10: 4420,4465 4536.57,4465 4616.85,4545.28 ; v1(4790,5745) 5070,5745 v1(5075,5750)
PC0: "AT MEGA 16/32/8535.22" LCD.4 | length 2245.8
  Bottom Layer w15: LCD.4 3626.13,4666 5596.13,4666 5716.85,4545.28
PC1: "AT MEGA 16/32/8535.23" LCD.5 | length 2222.5
  Top Layer w15: LCD.5 3651.85,4658.15 3920,4390 v1(4655,4390)
  Bottom Layer w15: v1(4655,4390) 4685,4420 5491.57,4420 5616.85,4545.28
PC2: "AT MEGA 16/32/8535.24" LCD.6 | length 1899.7
  Top Layer w15: LCD.6 3751.85,4683.15 v1(3820,4615)
  Bottom Layer w15: v1@3810,4615 v1(3820,4615) 5465,4615 5516.85,4563.15 5516.85,4545.28
PC3: "AT MEGA 16/32/8535.25"
PC4: "AT MEGA 16/32/8535.26" LCD.11 | length 1632.9
  Top Layer w15: v1(5315,4995) 5315,4553.43 5320,4548.43 5316.85,4545.28
  Bottom Layer w15: LCD.11 4520,5008.43 4523.43,5005 5305,5005 v1(5315,4995)
PC5: "AT MEGA 16/32/8535.27" LCD.12 | length 1402.4
  Top Layer w15: 5216.85,4545.28 5230,4558.43 v1(5230,4957.5)
  Bottom Layer w15: LCD.12 4574.07,4962.5 5225,4962.5 v1(5230,4957.5) v1@5242.5,4957.5
PC6: "AT MEGA 16/32/8535.28" LCD.13 | length 1165.2
  Top Layer w15: LCD.13 4626.57,4915 v1(4875,4915) ; 5116.85,4545.28 5160,4588.43 v1(5160,4910)
  Bottom Layer w15: v1(4875,4915) 5155,4915 v1(5160,4910)
PC7: "AT MEGA 16/32/8535.29" LCD.14 | length 917.4
  Top Layer w15: LCD.14 4666.57,4855 v1(4830,4855) v1@4840,4855 ; 5016.85,4545.28 5070,4598.43 v1(5070,4855)
  Bottom Layer w15: v1(4830,4855) v1(5070,4855) v1@5080,4855
PWM1: "AT MEGA 16/32/8535.4" U1.2 U1.6 | length 1284.8
  Top Layer w15: 4216.85,3945.28 4387,3775.13 4387,3570.4 U1.2
  Bottom Layer w15: U1.2 4719.4,3238 5014.85,3238 U1.6
PWM2: "AT MEGA 16/32/8535.21" U1.9 U1.13 | length 2297.5
  Top Layer w15: U1.13 4741.85,3665 4992.4,3665 U1.9 ; v1@5800,3645 5910,3755 5910,3990 5970,4050 v1(5970,4140)
  Bottom Layer w15: U1.9 5067.13,3622.13 5097.78,3652.78 5807.22,3652.78 v1(5810,3650) ; 5816.85,4545.28 5965,4397.13 v1@5965,4125
RST: "AT MEGA 16/32/8535.9" C3.2 ISP.5 pad.2@2720,4555 pad.3@2720,4930 R_RST.1 Reset.2 | length 5802.3
  Top Layer w15: pad.3@2720,4930 2720,4555 2720,4541 v1(3358,3903) ; v1(3270,5490) 3770,5490 v1@3775,5485 ; v1@3365,3910 3372,3903 v1@3372,3889 ; Reset.2@4890,5349 4896,5349 5055,5190 R_RST.1
  Bottom Layer w15: ISP.5 pad.2@2720,4555 ; pad.3@2720,4930 2720,4980 3230,5490 v1(3270,5490) v1@3280,5490 ; v1(3358,3903) 3480,3781 4552.57,3781 4716.85,3945.28 ; v1(3760,5495) 4235,5495 C3.2 4624,5350 4625,5349 Reset.2@4890,5349
RX: "AT MEGA 16/32/8535.14" Telemetry.2 | length 173.1
  Top Layer w15: Telemetry.2 5216.85,3781.85 5216.85,3945.28
TX: "AT MEGA 16/32/8535.15" Telemetry.3 | length 173.1
  Top Layer w15: Telemetry.3 5316.85,3781.85 5316.85,3945.28
VCC: 5V.1 5V.3 5V.5 5V.7 "AT MEGA 16/32/8535.10" "AT MEGA 16/32/8535.30" "Trimpot 5K.1" C1.1 C2.2 D10.1 ISP.2 LCD.2 R1K.2@5250,5120 R_RST.2 Sensor.9 Telemetry.1 Ubec_out.2 | length 10092.9
  Top Layer w15: 4916.85,4545.28 4916.85,4769.03 5050.32,4902.5 5052.5,4902.5 5250,5100 5250,5120 5250,5215 R_RST.2 4945,5520 Sensor.9
  Bottom Layer w15: ISP.2 2365,4430 2365,4810 2420,4865 3300,4865 ; LCD.2 3351.85,4813.15 3300,4865 ; 4916.85,4545.28 4821.57,4450 4672.57,4450 4660.07,4437.5 4635.32,4437.5 4597.82,4400 4586,4400 4585,4399 C2.2 4540,4255 4520,4235 4520,4125 4605,4040 4770,4040 4816.85,3993.15 4816.85,3945.28 4948.13,3814 5071,3814 Telemetry.1 ; R_RST.2 4901,5256 4149,5256 C1.1 3745,5310 3300,4865 ; R1K.2@5250,5120 5975,5120 6055,5040 6055,4965 5960,4870 5872,4870 5962,4780 6135,4780 6305,4610 6305,4194.09 D10.1 6594.09,4049.09 5V.1 5V.3 5V.5 5V.7
  Bottom Layer w50: 5V.3 6835,4235 Ubec_out.2
VDD: U1.14
VIN: CAP.1 D9.2 FUSE.2 Ubec_in.2 | length 1889.1
  Top Layer w15: D9.2@7400,3825.91 D9.2
  Bottom Layer w15: CAP.1@7395,4275 CAP.1 ; 7565,4360 7572.5,4352.5
  Bottom Layer w50: Ubec_in.2 CAP.1@7395,4275 ; CAP.1 7490,4360 7565,4360 ; 7575,4350 7625,4300 7625,3910 7515.91,3800.91 D9.2 7425,3625 7635,3415 FUSE.2
pads on no net: "AT MEGA 16/32/8535.32" "Terminal 4 kaki 1. " ISP.3 LCD.7 LCD.8 LCD.9 LCD.10 Ubec_in.1 Ubec_out.1

## Polygon pours and split planes (outlines as drawn)
GND on Bottom Layer "Bottom Layer-No Net" (solid, pour order 0): 1485,5600 1485,1660 8445,1660 8445,5595 8395,5645 7215,6825 7150,6825 2710,6825 2620,6735
GND on Top Layer "Bottom Layer-No Net" (solid, pour order 2): 1485,5600 1485,1660 8445,1660 8445,5595 8370,5670 7215,6825 2710,6825

## Other copper
Top Layer:
  rectangle net GND: 5917,4814.94 5959.5,4857.44
  rectangle net GND: 5884.56,4750 6005,4825
Bottom Layer:
  text "EL3014 - SISTEM MIKROPROSESOR" at 7425,6400 h60
  text "by : 13213022 / 13213063 / 13213083" at 7590,6215 h60

## Silkscreen, mask and mechanical layers (free items; w line width, h text height)
Top Overlay:
  lines w10: 8440,1660 1485,1660 1485,5600 2710,6825 7215,6825 8445,5595 8445,1660
  text "EL-3014" at 3795,6460 h118.11 r180
  text "\"SISMIKBOT\"" at 7190,6420 h118.11 r180
  text "Switch" at 7575,5160 h60 r90
  text "M2" at 5180,2300 h95
  text "M4" at 4395,2295 h95
  text "M3" at 4780,2295 h95
  text "M1" at 5575,2295 h95
  text "13213022 / 13213063 / 13213083" at 3365,2060 h118.11

## Dimensions
1485,1660 to 8445,1660 on Top Overlay

## Text inside footprints (layer, text, board x,y; h text height)
5V: Top Overlay "2" at 6600,4035 h50 r90; Top Overlay "1" at 6700,4055 h50 r90; Top Overlay "7" at 6700,4495 h50 r90; Top Overlay "8" at 6600,4495 h50 r90